# Altium PCB Mach khoa so dien tu - Duyen Duc.PcbDoc
Units mm, origin at the board's own origin, x right, y up, seen from the top; angles counter-clockwise.
Board outline 94.73 x 54.09 mm, 2 copper layers (Top Layer, Bottom Layer); 25 components, 29 nets, 96 pads, 114 vias.
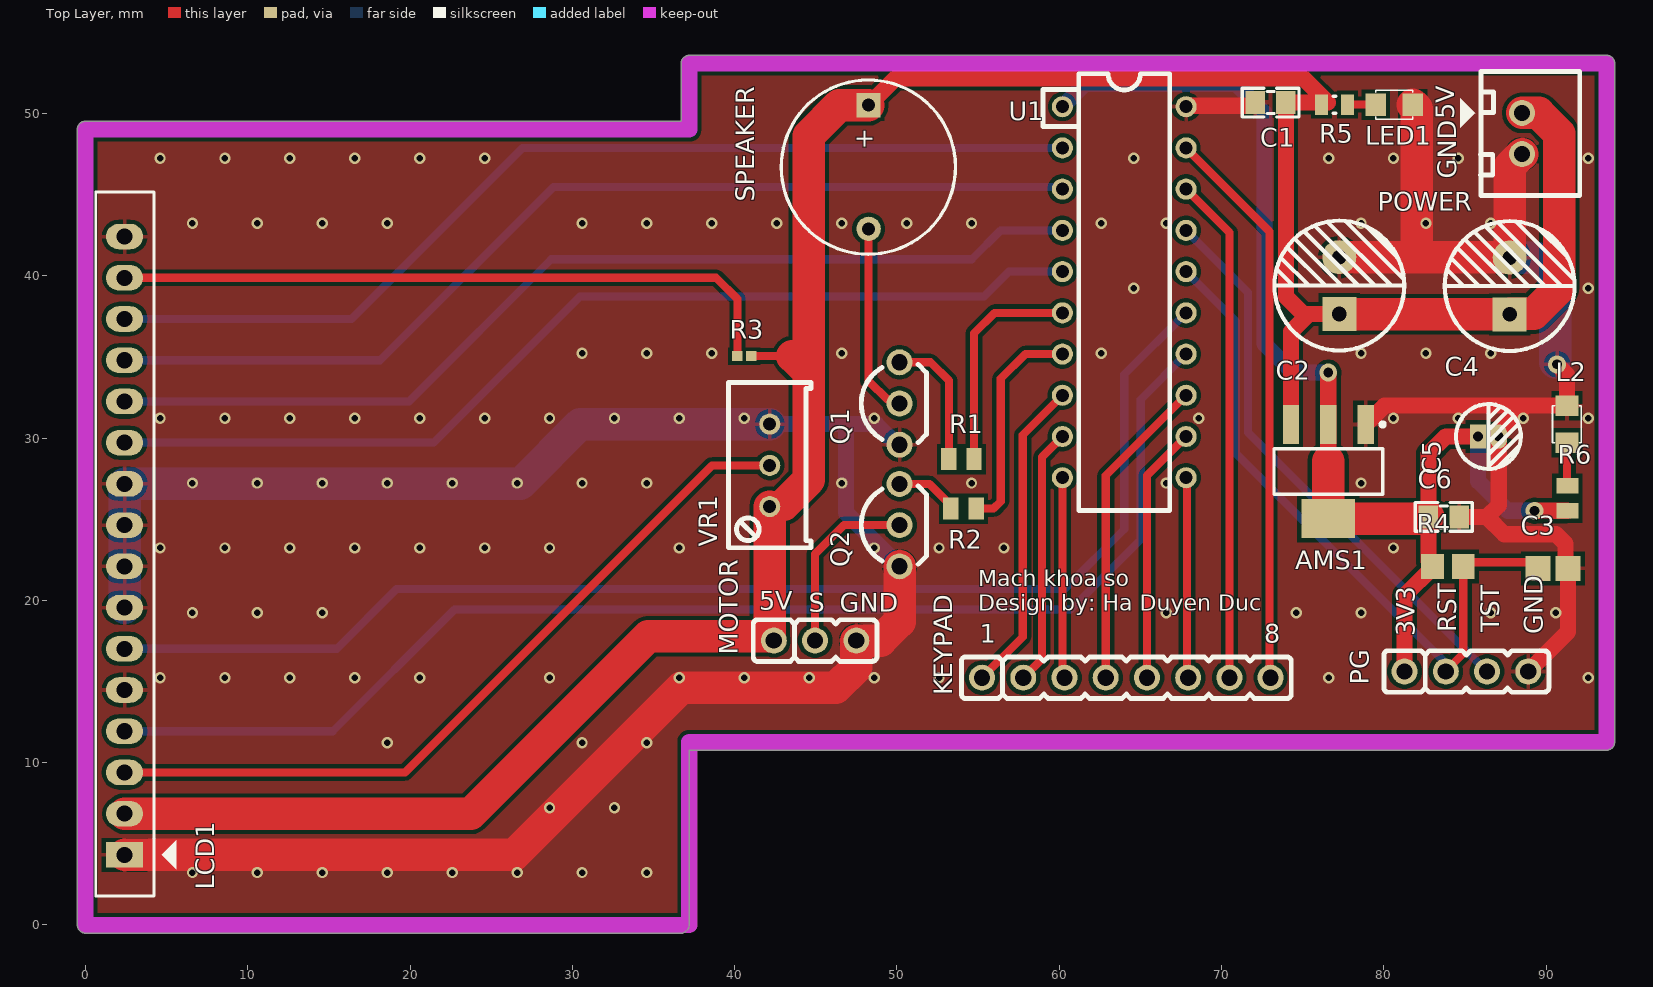
[diagram p0: Top Layer view]
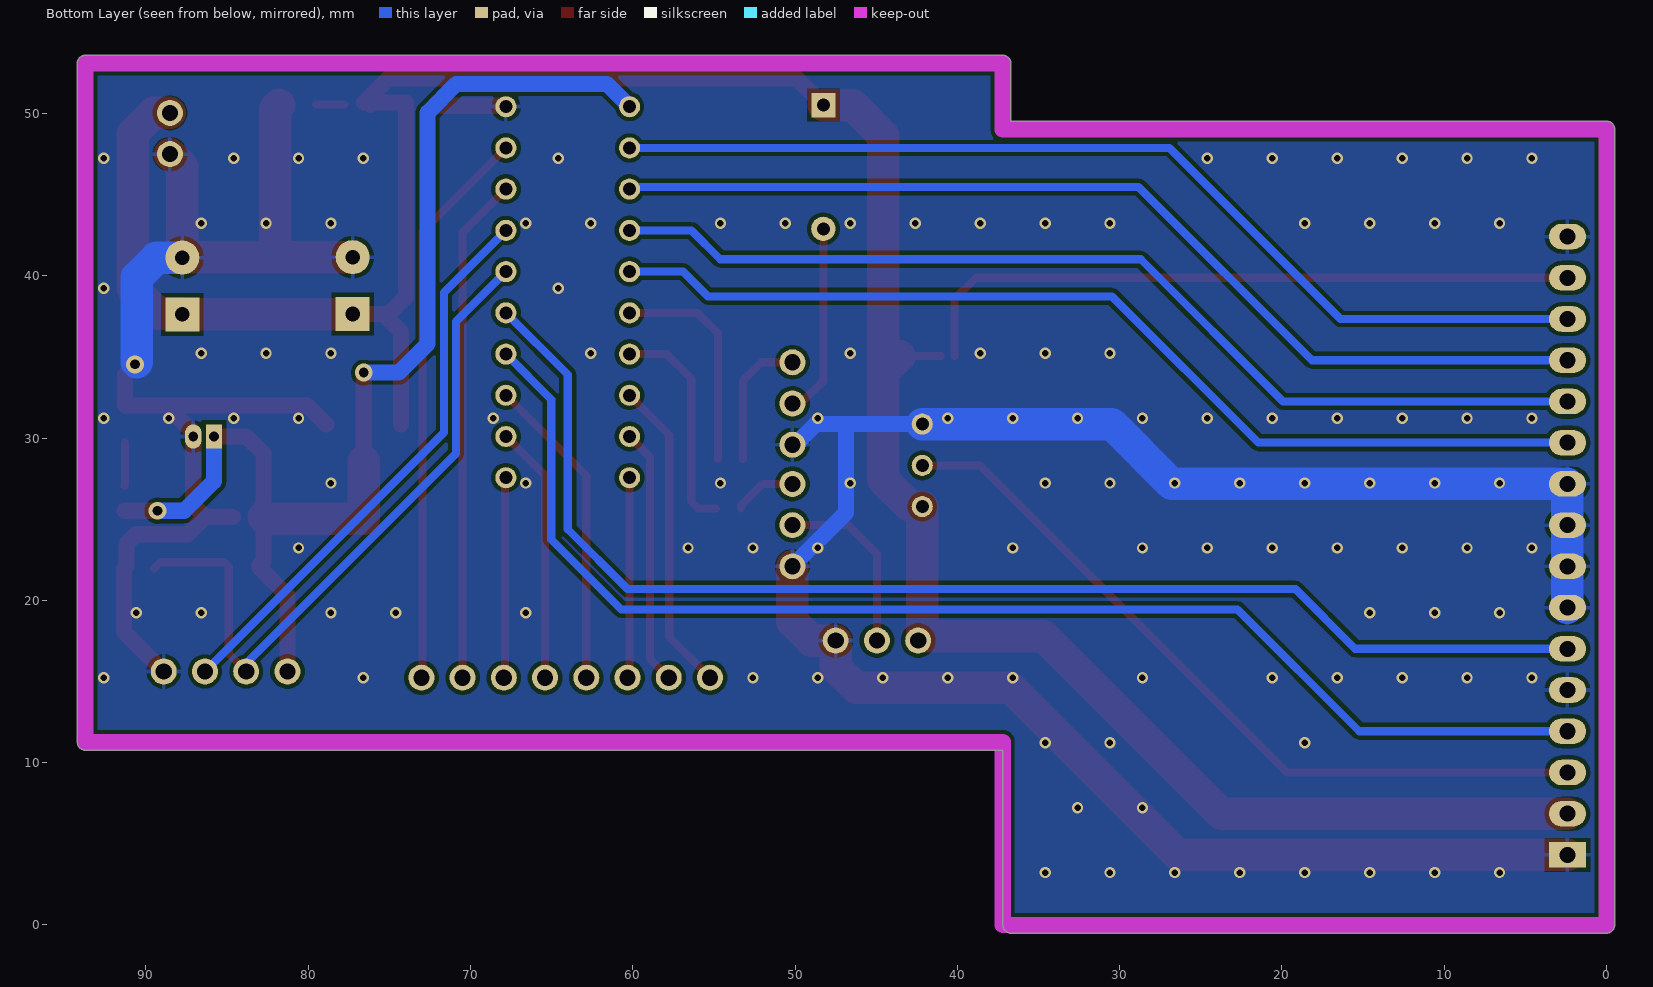
[diagram p1: Bottom Layer view, seen from below]
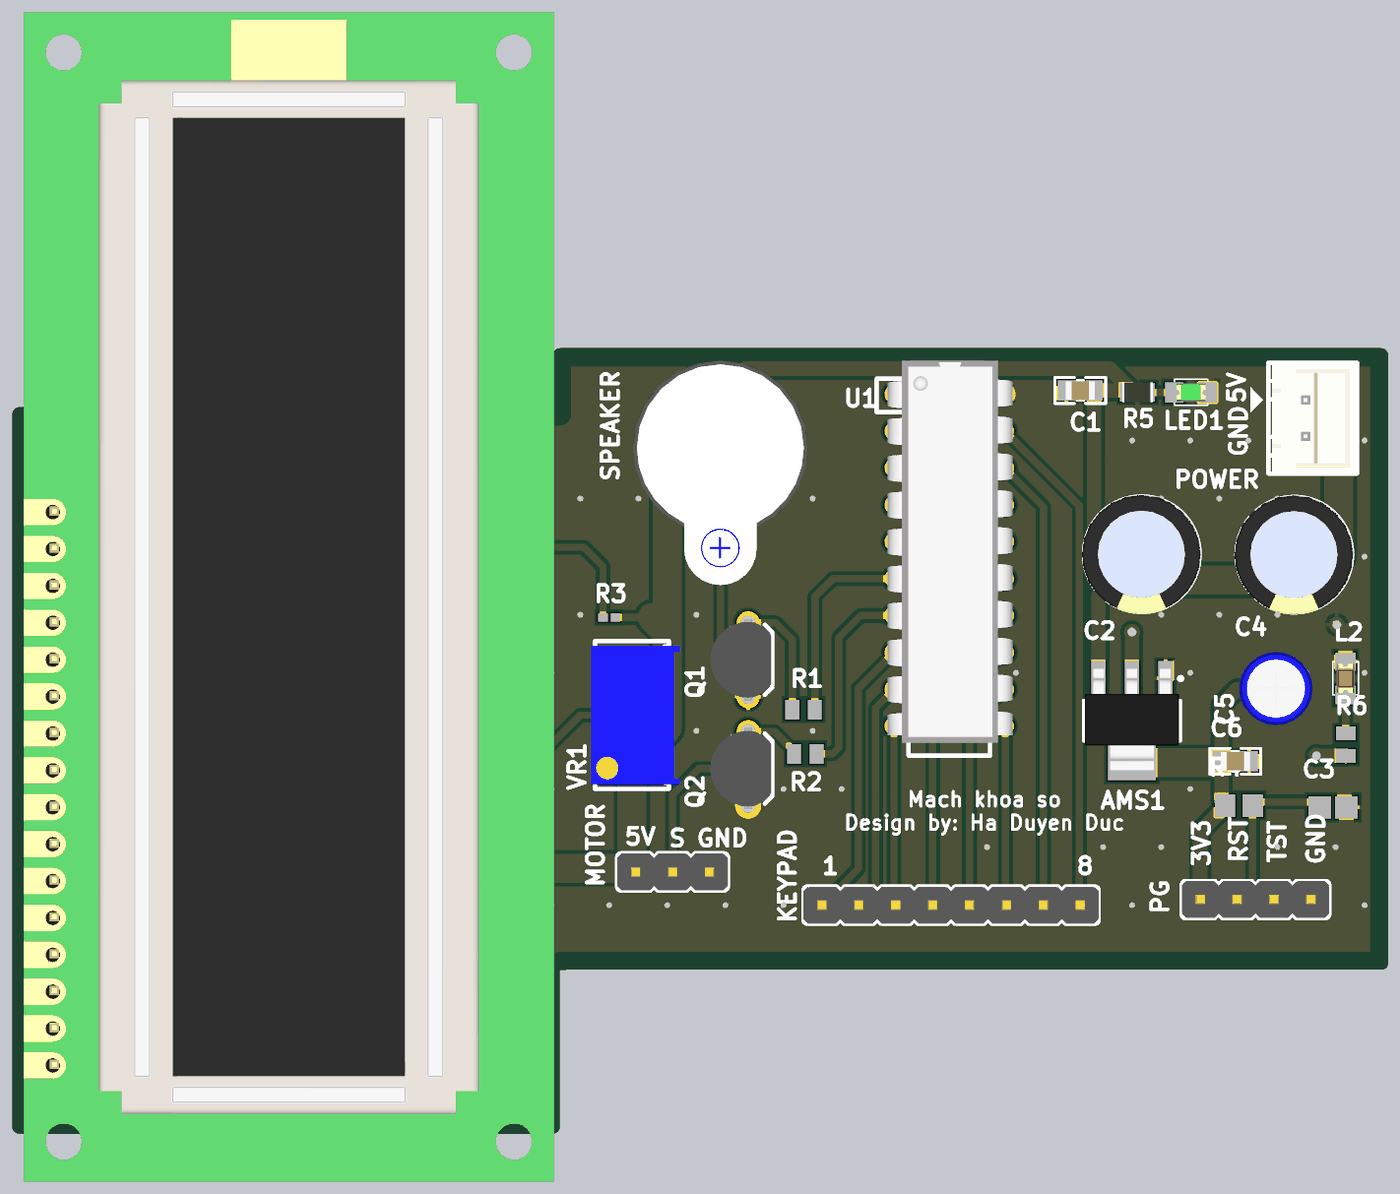
[diagram p2: 3D render of the assembled board from above, using the file's embedded part models]

## Layer stack, top to bottom
Top Solder: solder mask 0.0102, Solder Resist, Dk 3.5
Top Layer: signal copper 0.0356
Dielectric 1: dielectric 0.32, FR-4, Dk 4.8
Bottom Layer: signal copper 0.0356
Bottom Solder: solder mask 0.0102, Solder Resist, Dk 3.5

## Board outline
-0.5,0 ccw(c0,0) 0.064,-0.496 ccw(c0.127,0) 0.127,-0.5 36.703,-0.5 ccw(c36.703,0) 37.203,0 37.203,10.772 93.726,10.772 ccw(c93.726,11.272) 94.226,11.272 94.226,53.086 ccw(c93.726,53.086) 93.726,53.586 37.211,53.586 ccw(c37.211,53.086) 36.711,53.086 36.711,49.522 0,49.522 ccw(c0,49.022) -0.5,49.022

## Design rules (kind name [scope] priority, off if disabled: settings)
Clearance [All] p1: gap=0.254 ignorepadtopadclearanceinfootprint=FALSE except(0: Arc-Hole Track-Hole SMDPad-Hole THPad-Hole Via-Hole Fill-Hole Poly-Hole Region-Hole Text-Hole)
PolygonConnect [All] p1: connectstyle=Relief reliefconductorwidth=0.254 reliefentries=4 polygonreliefangle="90 Angle" airgapwidth=0.254
RoutingVias RoutingVias_POWER [InNetClass('All Nets')] p1: holewidth=0.6 width=1.1 viastyle="Through Hole" minholewidth=0.6 minwidth=1.1 maxholewidth=0.6 maxwidth=1.1
RoutingVias [All] p2: holewidth=0.4 width=0.7 viastyle="Through Hole" minholewidth=0.4 minwidth=0.7 maxholewidth=0.4 maxwidth=0.7
SolderMaskExpansion [All] p1: expansion=0.102 istentingtop=FALSE
Width Width_POWER [InNetClass('POWER')] p1: maxlimit=2 minlimit=0.3 preferedwidth=1
Width [All] p2: maxlimit=0.5 minlimit=0.3 preferedwidth=0.3
30 further rules are at their usual default settings.

## Classes and differential pairs
net class POWER: 3V3 5V GND

## Components (designator, comment, footprint, x,y, rotation, side; value= is the part's Value field where it differs from the comment)
AMS1 "AMS1117-3.3V" SOT223 76.581,27.94 r180 top value="AMS1117-3.3V SOT223"
C1 "100nF" "tu 0805" 73.025,50.673 r180 top
C2 "470uF" "tu hoa 8mm" 77.258,39.398 r90 top
C3 "1NF" CAPC2013X94X50ML20T25 90.424,21.971 r180 top
C4 "470uF" "tu hoa 8mm" 87.757,39.37 r90 top
C5 "22uF" "tu hoa 4mm" 86.445,30.099 r0 top
C6 "100nF" "tu 0805" 83.693,25.146 r0 top
KEYPAD "Matrix key" Header_8 64.135,15.24 r0 top (schematic designator HD2)
L2 "LED 0805" LED-0805-Red 91.285,29.718 r90 top
LCD1 "LCD1602 XL" "LCD1602 with Jump" 2.413,4.318 r90 top locked
LED1 "LED 0805" LED-0805-Green 79.502,50.546 r0 top (schematic designator L1)
MOTOR "Motor Servo" Header_3 44.958,17.526 r0 top value="Header 3" (schematic designator HD1)
PG "Program" Header_4 85.09,15.621 r0 top value="Header 4" (schematic designator HD3)
POWER "5VDC-2A" CON2 88.519,48.768 r270 top value="Connector 2" (schematic designator JP1)
Q1 "2SC1815" 2SC1815 50.165,32.131 r90 top
Q2 "2SC1815" 2SC1815 50.165,24.638 r90 top
R1 "4K7" RESC2013X70X40LL20T20 53.975,28.702 r180 top
R2 "4K7" RESC2013X70X40LL20T20 54.102,25.654 r180 top
R3 "330R" RESC1005X40X25NL10T10 40.596,35.052 r180 top
R4 "47K" RESC2013X60X40ML20T25 83.947,22.098 r180 top
R5 "330R" RESC2013X60X35LL10T20 76.962,50.546 r0 top
R6 "39R" RESC2013X70X40LL20T20 91.313,26.289 r90 top
SPEAKER "Coi Chip Speaker" "Coi Chip Speacker" 48.247,50.513 r270 top (schematic designator LS1)
U1 "MSP430G2553IN20" MSP430G2553 60.198,50.419 r270 top
VR1 "10K" VR1 42.164,25.781 r90 top value="VR 10K"

## Footprints (in the part's own frame and the unit in brackets; to place one, negate y for a bottom-side part, rotate by r counter-clockwise, add the part's x,y. Pads: shape width x height; smd on the part's side, far side on the other; paste and mask are expansions set on the pad)
2SC1815 [mm] "TO-92 Body Dia. 4.5mm; Leads 0.51 x 0.48 mm (max)"
  round 1.6 hole 1 mask+0.1: 1(-2.54,0) 2(0,0)
  round 1.6 hole 1: 3(2.54,0)
  silkscreen extent -2.41,-1.65 2.41,2.37, body extent -2.79,-1.59 2.79,2.61, height 10
CAPC2013X94X50ML20T25 [mm] "Chip Capacitor, 2-Leads, Body 2.01x1.25mm, IPC Low Density"
  rect 1.55x1.55 smd: 1(-0.925,0) 2(0.925,0)
  body extent -1.1,-0.72 1.11,0.72, height 0.94
"Coi Chip Speacker" [mm]
  rect 1.5x1.5 hole 0.8: 1(0,0)
  round 1.5 hole 0.8: 2(7.62,0.013)
  silkscreen extent -1.55,-5.38 9.18,5.36, body extent -2.22,-6 13.24,6, height 4.5
CON2 [mm] "CON2"
  round 1.6 hole 1 mask+0.1: 1(-1.27,0) 2(1.27,0)
  silkscreen extent -3.81,-3.8 3.81,3.56, body extent -3.75,-2.29 3.75,3.41, height 7
Header_3 [mm] "Connector DIP, 3Pin_2.54mm"
  round 1.6 hole 1 mask+0.1: 1(-2.54,0) 2(0,0) 3(2.54,0)
  silkscreen extent -3.81,-1.28 3.81,1.28, body extent -3.81,-1.27 3.81,1.27, height 10.1
Header_4 [mm] "Connector DIP, 4Pin_2.54mm"
  round 1.6 hole 1 mask+0.1: 1(-3.81,0) 2(-1.27,0) 3(1.27,0) 4(3.81,0)
  silkscreen extent -5.08,-1.28 5.08,1.28, body extent -5.08,-1.27 5.08,1.27, height 10.1
Header_8 [mm] "Connector DIP Male, 8Pin_2.54mm"
  round 1.6 hole 1 mask+0.1: 1(-8.89,0) 2(-6.35,0) 3(-3.81,0) 4(-1.27,0) 5(1.27,0) 6(3.81,0) 7(6.35,0) 8(8.89,0)
  silkscreen extent -10.16,-1.28 10.16,1.28, body extent -10.16,-1.27 10.16,1.27, height 10.1
"LCD1602 with Jump" [mil] "LCD dipslay 16x2, 16 pin"
  rect 62x90 hole 39: 1(0,0)
  oval 62x90 hole 39: 2(100,0) 3(200,0) 4(300,0) 5(400,0) 6(500,0) 7(600,0) 8(700,0) 9(800,0) 10(900,0) 11(1000,0) 12(1100,0) 13(1200,0) 14(1300,0) 15(1400,0) 16(1500,0)
  silkscreen extent -100,-125 1608,70, body extent -320,-1353 2850,84, height 764
LED-0805-Green [mil]
  rect 50x55 smd: 1(0,0) 2(90,0)
  silkscreen extent 0,-35 90,35, body extent 5,-25 85,25, height 43
LED-0805-Red [mil]
  rect 50x55 smd: 1(0,0) 2(90,0)
  silkscreen extent 0,-35 90,35, body extent 5,-25 85,25, height 43
MSP430G2553 [mm] "DIP 20, 20 PIN, W 300mil, Pin to pin 100mil"
  round 1.3 hole 0.8: 1(0,0) 2(2.54,0) 3(5.08,0) 4(7.62,0) 5(10.16,0) 6(12.7,0) 7(15.24,0) 8(17.78,0) 9(20.32,0) 10(22.86,0) 11(22.86,7.62) 12(20.32,7.62) 13(17.78,7.62) 14(15.24,7.62) 15(12.7,7.62) 16(10.16,7.62) 17(7.62,7.62) 18(5.08,7.62) 19(2.54,7.62) 20(0,7.62)
  silkscreen extent -2.03,-1.19 24.89,6.61, body extent -2.31,-0.46 24,8.18, height 3.94
RESC1005X40X25NL10T10 [mm] "Chip Resistor, 2-Leads, Body 1.00x0.50mm, IPC Medium Density"
  rect 0.65x0.6 smd: 1(-0.425,0) 2(0.425,0)
  body extent -0.55,-0.3 0.55,0.3, height 0.4
RESC2013X60X35LL10T20 [mm] "Chip Resistor, 2-Leads, Body 2.1x1.35mm, IPC High Density"
  rect 0.8x1.25 smd: 1(-0.8,0) 2(0.8,0)
  silkscreen extent -0.1,-0.53 0.1,0.53, body extent -1.05,-0.67 1.05,0.68, height 0.6
RESC2013X60X40ML20T25 [mm] "Chip Resistor, 2-Leads, Body 2.00x1.25mm, IPC Low Density"
  rect 1.4x1.55 smd: 1(-0.95,0) 2(0.95,0)
  body extent -1.1,-0.72 1.1,0.72, height 0.6
RESC2013X70X40LL20T20 [mm] "Chip Resistor, 2-Leads, Body 2.00x1.25mm, IPC High Density"
  rect 0.95x1.35 smd: 1(-0.775,0) 2(0.775,0)
  body extent -1.1,-0.72 1.1,0.72, height 0.7
SOT223 [mm]
  rect 1x2.4 smd: 1(-2.3,-2.9) 2(0,-2.9) 3(2.3,-2.9)
  rect 3.3x2.4 smd: 4(0,2.9)
  silkscreen extent -3.48,-3.02 3.35,1.4, body extent -3.25,-3.56 3.25,3.4, height 1.68
"tu 0805" [mm] "Compoment SMD 80x50mil"
  rect 1.2x1.4 smd: 1(-0.946,-0.003) 2(0.954,-0.003)
  silkscreen extent -1.75,-0.89 1.75,0.89, body extent -1.01,-0.64 1.01,0.63, height 0.61
"tu hoa 4mm" [mm]
  rect 1x1.5 hole 0.6: 1(-0.635,0)
  oval 1x1.5 hole 0.6: 2(0.635,0)
  silkscreen extent -2,-2 2.01,2.01, body extent -2.47,-2.47 2.58,2.58, height 14.81
"tu hoa 8mm" [mm]
  rect 2.1x2.1 hole 0.9: 1(-1.75,0)
  round 2.1 hole 0.9: 2(1.75,0)
  silkscreen extent -4,-4 4,4, body extent -4.1,-4.07 4.1,4.13, height 13.81
VR1 [mm] "Variable Resistor"
  round 1.3 hole 0.8 mask+0.1: 1(0,0) 2(2.54,0) 3(5.08,0)
  silkscreen extent -2.54,-2.54 7.65,2.54, body extent -2.22,-3.3 7.3,2.79, height 11.56

## Part data
AMS1: library part "AMS1117 SMD", "Dán", Chung_Loai=Dán, Don_Vi=Con, Ma_Hang=MH000596
C1 C6: library part "Tu 0805 104 50V 10%", "Dán", Chung_Loai=Dán, Don_Vi=Con, Ma_Hang=MH004551, So_Chan=2, Ten_Linh_Kien="Tụ 0805 104-100nF 10% 50V"
C2: library part "Tu Hoa 470uF 16V 8x11", "Cắm", Chung_Loai=Cắm, Don_Vi=Con, Ma_Hang=MH006550, So_Chan=2, Ten_Linh_Kien="Tụ Hóa 470uF 16V 8x11MM"
C3: library part CMP-1036-02979-2, Manufacturer="AVX Interconnect / Elco", Part Number=08055C102KAT2A.
C4: library part "Tu Hoa 470uF 25V 8x13", "Cắm", Chung_Loai=Cắm, Don_Vi=Con, Ma_Hang="MH 470uF 25V", So_Chan=2, Ten_Linh_Kien="Tụ Hóa 470uF 25V"
C5: library part "Tu Hoa 22uF 16V 4x7", "Cắm", Chung_Loai=Cắm, Don_Vi=Con, Ma_Hang=MH006857, So_Chan=2, Ten_Linh_Kien="Tụ Hóa 22uF 16V"
KEYPAD: library part Header8, "Header 8", Creat by=VanDungEvn@Gmail.com
L2: library part "LED 0805 Do", "Dán", Chung_Loai=Dán, Don_Vi=Con, Ma_Hang=MH000897, Ten_Linh_Kien="LED 0805 Màu Đỏ (Red)"
LCD1: "LCD 1602 Xanh Lá", CHIP=HD44780, Ma_Hang=67HZ, NCC=NSHOP, Ten="Màn hình LCD 1602 Xanh Lá"
LED1: library part "LED 0805 Xanh La", "Dán", Chung_Loai=Dán, Don_Vi=Con, Ma_Hang=MH002326, Ten_Linh_Kien="LED 0805 Màu Xanh Lá (Green)"
MOTOR: library part Header3, "Header 3"
PG: library part Header4, "Header 4"
POWER: library part Con2, "Connector 2"
Q1 Q2: "Trans NPN 50V 150mA TO-92", ComponentLink1Description=Datasheet, ComponentLink1URL="D:\Dropbox\Datasheets\Transistors\P Channel Bipolar\2SC1815.pdf", Unit Price=0.0143
R1 R2 R6: library part CMP-2001-00544-1, Manufacturer=Panasonic, Part Number=ERJ6ENF39R0V
R3: library part CMP-2002-06135-1, Manufacturer=Multicomp, Part Number=MC00625W04021330R
R4: library part CMP-2001-00645-1, Manufacturer=Panasonic, Part Number=ERA6AEB473V
R5: library part CMP-2000-06960-1, "Chip Resistor, 330 Ohm, +/- 1%, 125 mW, -55 to 155 degC, 0805 (2012 Metric), RoHS, Tape and Reel", Case Code - in=0805, Case Code - mm=2012, Manufacturer=Yageo, Operating Temperature Range=-55Cto+155C, Package Description="2-Pin Surface Mounted Device, Body 2 x 1.25 mm", Power Rating=125mW(1/8W), Resistance=330Ohms, Temperature Coefficient=100PPM/C, Tolerance=1%, Voltage Rating=150V, Datasheet URL=http://www.yageo.com/documents/recent/PYu-RC_Group_51_RoHS_L_7.pdf, Datasheet Version="Rev. 7, 05/2017", Manufacturer URL=http://www.yageo.com/, Mounting Technology=SurfaceMount, Package Reference=0805, Packaging=Reel, Product=ThickFilmResistorsGeneralPurpose, Series=RC, Termination Style=SMD/SMT
SPEAKER: "Còi chip"
U1: "MCU 16bit 16KB 1.8-3.6V 16MHz DIP20", ComponentLink1Description=Datasheet, ComponentLink1URL="D:\Dropbox\Datasheets\Microcontrolers\MSP430\MSP430x2xx Family\MSP430G2553.pdf", Unit Price=1.0000
VR1: library part VR2, "Var Resistor"

## Via types
v1: diameter 0.7, hole 0.4, Top Layer to Bottom Layer, tented both sides, 111 vias
v2: diameter 1.1, hole 0.6, Top Layer to Bottom Layer, tented both sides, 3 vias

## Nets (pads, with @x,y where several pads share a name; then routed paths per layer and width w, separated by ;. In a path a pad name is that pad's centre, name@x,y a point inside that pad or via, vN(x,y) a via of type N, cw(c..) or ccw(c..) an arc to the next point about the centre after c; other vN are vias at no path point)
3V3: AMS1.2 AMS1.4 C5.1 C6.1 PG.1 R4.2 R6.1 U1.1 | length 74.6
  Top Layer w1: 76.581,28.575 AMS1.2 v2(76.581,34.036) ; PG.1 81.28,20.306 82.997,22.023 R4.2 82.997,22.173 82.747,22.423 C6.1 82.747,29.026 83.82,30.099 C5.1 ; v2(89.281,25.527) 89.287,25.521 91.307,25.521 R6.1
  Top Layer w2: 76.581,28.575 AMS1.4 82.645,25.04 C6.1
  Bottom Layer w1: U1.1 61.602,51.823 70.866,51.823 72.644,50.045 72.644,35.814 74.422,34.036 v2(76.581,34.036) ; C5.1 85.81,27.347 87.63,25.527 v2(89.281,25.527)
5V: AMS1.3 C1.1 C2.1 C4.1 LCD1.2 MOTOR.1 POWER.1 R3.1 R5.1 SPEAKER.1 VR1.1 | length 166.4
  Top Layer w0.3: VR1.1 42.261,25.878 43.023,25.878
  Top Layer w0.5: R3.1 43.561,35.052
  Top Layer w1: SPEAKER.1 49.912,52.177 75.055,52.177 R5.1@76.556,50.676 ; AMS1.3 74.281,36.562 75.367,37.648 ; R5.1 76.162,50.571 76.057,50.676 C1.1 73.971,38.714 75.037,37.648 C2.1
  Top Layer w2: LCD1.2 23.749,6.858 34.671,17.78 42.164,17.78 VR1.1 ; 43.023,25.878 44.577,27.432 44.577,34.036 ; 43.561,35.052 44.577,34.036 ; SPEAKER.1 46.449,50.513 44.577,48.641 44.577,34.036 ; C2.1 77.272,37.634 87.743,37.634 C4.1 87.807,37.67 89.252,37.67 90.805,39.223 90.805,48.768 89.535,50.038 POWER.1
DATA4: LCD1.11 U1.5 | length 62.2
  Bottom Layer w0.5: LCD1.11 21.463,29.718 30.48,38.735 55.372,38.735 56.896,40.259 U1.5
DATA5: LCD1.12 U1.4 | length 62.2
  Bottom Layer w0.5: LCD1.12 19.939,32.258 28.702,41.021 54.61,41.021 56.388,42.799 U1.4
DATA6: LCD1.13 U1.3 | length 62.3
  Bottom Layer w0.5: LCD1.13 18.161,34.798 28.829,45.466 60.071,45.466 U1.3
DATA7: LCD1.14 U1.2 | length 62.2
  Bottom Layer w0.5: LCD1.14 16.383,37.338 26.924,47.879 U1.2
GND: AMS1.1 C1.2 C2.2 C3.1 C4.2 C5.2 C6.2 L2.2 LCD1.1 LCD1.5 LCD1.7 LCD1.8 LCD1.9 LCD1.10 LCD1.16 LED1.2 MOTOR.3 PG.4 POWER.2 Q1.1 Q2.1 U1.20 VR1.3 | length 205.2
  Top Layer w1: U1.20 67.875,50.476 71.971,50.476 72.071,50.576 C1.2 ; AMS1.1 80.045,32.004 88.735,32.004 ; C6.2 86.357,25.143 ; PG.4 91.348,18.069 C3.1@91.348,21.696 ; v2(90.678,34.544) 90.678,34.519 91.285,33.912 L2.2 88.735,32.004 ; C3.1@91.349,21.697 C3.1 91.198,22.122 91.198,23.492 90.613,24.077 87.422,24.077 86.357,25.143 ; 86.357,25.143 87.08,25.866 C5.2 87.08,30.349 88.735,32.004
  Top Layer w2: LCD1.1 26.416,4.318 36.703,14.605 46.228,14.605 47.498,15.875 MOTOR.3 48.993,17.526 50.165,18.698 Q2.1 ; C2.2 77.272,41.134 87.743,41.134 C4.2 87.757,46.736 POWER.2 ; LED1.2 82.042,50.292 82.042,41.134
  Bottom Layer w1: VR1.3 46.863,30.861 ; Q2.1 46.863,25.4 46.863,30.861 ; Q1.1 50.003,29.591 48.733,30.861 46.863,30.861 ; v2@90.551,34.671 v2(90.678,34.544)
  Bottom Layer w2: LCD1.7 LCD1.8 LCD1.9 LCD1.10 26.797,27.178 30.48,30.861 VR1.3 ; C4.2 87.776,41.101 89.349,41.101 90.551,39.898 v2@90.551,34.671
  other v1: 6.597,3.233 10.597,3.233 14.597,3.233 18.597,3.233 22.597,3.233 26.597,3.233 30.597,3.233 34.597,3.233 28.597,7.233 32.597,7.233 18.597,11.233 30.597,11.233 34.597,11.233 4.597,15.233 8.597,15.233 12.597,15.233 16.597,15.233 20.597,15.233 28.597,15.233 36.597,15.233 40.597,15.233 44.597,15.233 48.597,15.233 52.597,15.233 76.597,15.233 92.597,15.233 6.597,19.233 10.597,19.233 14.597,19.233 66.597,19.233 74.597,19.233 78.597,19.233 86.597,19.233 90.597,19.233 4.597,23.233 8.597,23.233 12.597,23.233 16.597,23.233 20.597,23.233 24.597,23.233 28.597,23.233 36.597,23.233 48.597,23.233 52.597,23.233 56.597,23.233 80.597,23.233 6.597,27.233 10.597,27.233 14.597,27.233 18.597,27.233 22.597,27.233 26.597,27.233 30.597,27.233 34.597,27.233 46.597,27.233 54.597,27.233 66.597,27.233 78.597,27.233 4.597,31.233 8.597,31.233 12.597,31.233 16.597,31.233 20.597,31.233 24.597,31.233 28.597,31.233 32.597,31.233 36.597,31.233 40.597,31.233 48.597,31.233 68.597,31.233 80.597,31.233 84.597,31.233 88.597,31.233 92.597,31.233 30.597,35.233 34.597,35.233 38.597,35.233 46.597,35.233 62.597,35.233 78.597,35.233 82.597,35.233 86.597,35.233 64.597,39.233 92.597,39.233 6.597,43.233 10.597,43.233 14.597,43.233 18.597,43.233 30.597,43.233 34.597,43.233 38.597,43.233 42.597,43.233 46.597,43.233 50.597,43.233 54.597,43.233 62.597,43.233 66.597,43.233 78.597,43.233 82.597,43.233 86.597,43.233 4.597,47.233 8.597,47.233 12.597,47.233 16.597,47.233 20.597,47.233 24.597,47.233 64.597,47.233 76.597,47.233 80.597,47.233 84.597,47.233 92.597,47.233
KEY1: KEYPAD.1 U1.8 | length 19.5
  Top Layer w0.5: KEYPAD.1 57.75,17.745 57.75,30.191 U1.8
KEY2: KEYPAD.2 U1.9 | length 15.9
  Top Layer w0.5: KEYPAD.2 58.928,16.383 58.928,28.829 U1.9
KEY3: KEYPAD.3 U1.10 | length 12.4
  Top Layer w0.5: U1.10 60.198,15.367 KEYPAD.3
KEY4: KEYPAD.4 U1.13 | length 19.5
  Top Layer w0.5: KEYPAD.4 62.865,27.686 U1.13
KEY5: KEYPAD.5 U1.12 | length 15.9
  Top Layer w0.5: KEYPAD.5 65.405,27.686 U1.12
KEY6: KEYPAD.6 U1.11 | length 12.4
  Top Layer w0.5: U1.11 67.882,27.495 67.882,15.303 KEYPAD.6
KEY7: KEYPAD.7 U1.18 | length 31.2
  Top Layer w0.5: U1.18 70.485,42.672 KEYPAD.7
KEY8: KEYPAD.8 U1.19 | length 34.8
  Top Layer w0.5: U1.19 72.967,42.73 72.967,15.298 KEYPAD.8
LCD_EN: LCD1.6 U1.15 | length 79.6
  Bottom Layer w0.5: LCD1.6 15.494,17.018 19.177,20.701 60.325,20.701 64.008,24.384 64.008,33.909 U1.15
LCD_RS: LCD1.4 U1.14 | length 80.1
  Bottom Layer w0.5: LCD1.4 15.24,11.938 22.741,19.439 60.714,19.439 65.024,23.749 65.024,32.385 U1.14
MOTOR: R2.1 U1.7 | length 13.7
  Top Layer w0.5: R2.1 55.96,25.654 56.396,26.09 56.396,33.663 57.912,35.179 U1.7
NetHD1_2: MOTOR.2 Q2.2 | length 11.3
  Top Layer w0.5: MOTOR.2 44.958,22.86 46.736,24.638 Q2.2
NetL1_1: LED1.1 R5.2 | length 1.7
  Top Layer w0.5: R5.2 LED1.1
NetL2_1: L2.1 R6.2 | length 2.7
  Top Layer w0.5: L2.1 91.299,29.704 91.299,27.078 R6.2
NetLCD1_15: LCD1.15 R3.2 | length 41.8
  Top Layer w0.5: LCD1.15 38.862,39.878 40.171,38.569 R3.2
NetLS1_2: Q1.2 SPEAKER.2 | length 11.8
  Top Layer w0.5: SPEAKER.2 48.26,33.528 49.447,32.341 49.955,32.341 Q1.2
NetQ1_3: Q1.3 R1.2 | length 8.3
  Top Layer w0.5: Q1.3 52.07,34.671 53.2,33.541 R1.2
NetQ2_3: Q2.3 R2.2 | length 3.9
  Top Layer w0.5: Q2.3 52.003,27.178 53.327,25.854 R2.2
RESET: C3.2 PG.2 R4.1 U1.16 | length 43.1
  Top Layer w0.5: PG.2 83.82,15.659 84.897,16.736 R4.1 85.151,22.352 89.118,22.352 C3.2
  Bottom Layer w0.5: U1.16 70.886,37.191 70.886,29.063 83.61,16.339 83.61,15.831 PG.2
SPEAKER: R1.1 U1.6 | length 13.7
  Top Layer w0.5: R1.1 54.75,36.462 56.007,37.719 U1.6
TEST: PG.3 U1.17 | length 34.9
  Bottom Layer w0.5: U1.17 71.64,38.977 71.64,30.341 PG.3
Vadj: LCD1.3 VR1.2 | length 47.6
  Top Layer w0.5: LCD1.3 19.685,9.398 38.608,28.321 VR1.2

## Polygon pours and split planes (outlines as drawn)
GND on Top Layer "TOP POLY" (solid, remove dead copper, pour order 0): -0.127,49.276 37.338,49.276 37.338,53.086 37.719,52.705 93.853,52.705 93.853,11.557 93.472,11.176 36.703,11.176 36.703,0.254 36.83,0.127 36.703,0 0.127,0 0.127,48.768
GND on Bottom Layer "BOT POLY" (solid, remove dead copper, pour order 1): 0,48.514 0.381,48.895 36.957,48.895 36.957,52.832 37.338,53.213 37.592,52.959 93.472,52.959 93.472,11.303 93.599,11.176 93.345,10.922 36.957,10.922 36.957,0.762 36.703,0.508 0,0.508 0,48.768 0.381,49.149

## Keep-outs
Keep-Out Layer:
  lines w1: 0,0 0,49.022 37.211,49.022 37.211,53.086 93.726,53.086 93.726,11.272 37.211,11.272 37.211,0 0.127,0

## Silkscreen, mask and mechanical layers (free items; w line width, h text height)
Top Overlay:
  text "5V" at 84.328,49.657 h1.14 r90
  text "GND" at 84.455,45.974 h1.14 r90
  text "5V" at 41.529,19.431 h1.14
  text "Mach khoa so / Design by: Ha Duyen Duc" at 55.004,19.367 h1
  text "S" at 44.577,19.304 h1.14
  text "GND" at 46.482,19.304 h1.14
  text "RST" at 84.455,18.034 h1.14 r90
  text "TST" at 87.122,18.034 h1.14 r90
  text "GND" at 89.789,17.907 h1.14 r90
  text "3V3" at 81.915,17.78 h1.14 r90
  text "1" at 55.118,17.399 h1.14
  text "8" at 72.644,17.399 h1.14

## Dimensions
0.127,0 to 0,49.022 on Mechanical 10
0.127,0 to 93.853,0.762 on Mechanical 10

## Text inside footprints (layer, text, board x,y; h text height)
KEYPAD: Mechanical 2 "8" at 72.735,14.84 h1.14; Mechanical 2 "1" at 55.035,14.84 h1.14
MOTOR: Mechanical 2 "1" at 42.164,17.272 h1.14; Mechanical 2 "3" at 47.244,17.272 h1.14
PG: Mechanical 2 "4" at 88.646,15.367 h1.14; Mechanical 2 "1" at 81.026,15.367 h1.14
POWER: Mechanical 2 "1" at 88.019,50.168 h1.14 r270; Mechanical 2 "2" at 88.019,47.768 h1.14 r270
Q1: Mechanical 1 "B" at 50.546,34.417 h1.14 r90; Mechanical 1 "C" at 50.546,31.877 h1.14 r90; Mechanical 1 "E" at 50.546,29.337 h1.14 r90
Q2: Mechanical 1 "B" at 50.546,26.924 h1.14 r90; Mechanical 1 "C" at 50.546,24.384 h1.14 r90; Mechanical 1 "E" at 50.546,21.844 h1.14 r90
SPEAKER: Top Overlay "+" at 47.536,49.103 h1.14 r270
U1: Mechanical 1 "20" at 65.308,51.389 h1.14 r270; Mechanical 1 "11" at 65.308,28.289 h1.14 r270; Mechanical 1 "10" at 61.608,28.289 h1.14 r270; Mechanical 1 "1" at 61.508,50.689 h1.14 r270
VR1: Mechanical 1 "3" at 42.674,30.551 h1.14 r90; Mechanical 1 "2" at 42.694,28.021 h1.14 r90; Mechanical 1 "1" at 42.654,25.641 h1.14 r90